# Altium PCB PCB.PcbDoc
Units mm, origin at the board's own origin, x right, y up, seen from the top; angles counter-clockwise.
Board outline 17.15 x 17.99 mm, 2 copper layers (Top Layer, Bottom Layer), stack 1.55 mm thick; 6 components, 5 nets, 24 pads, 0 vias.
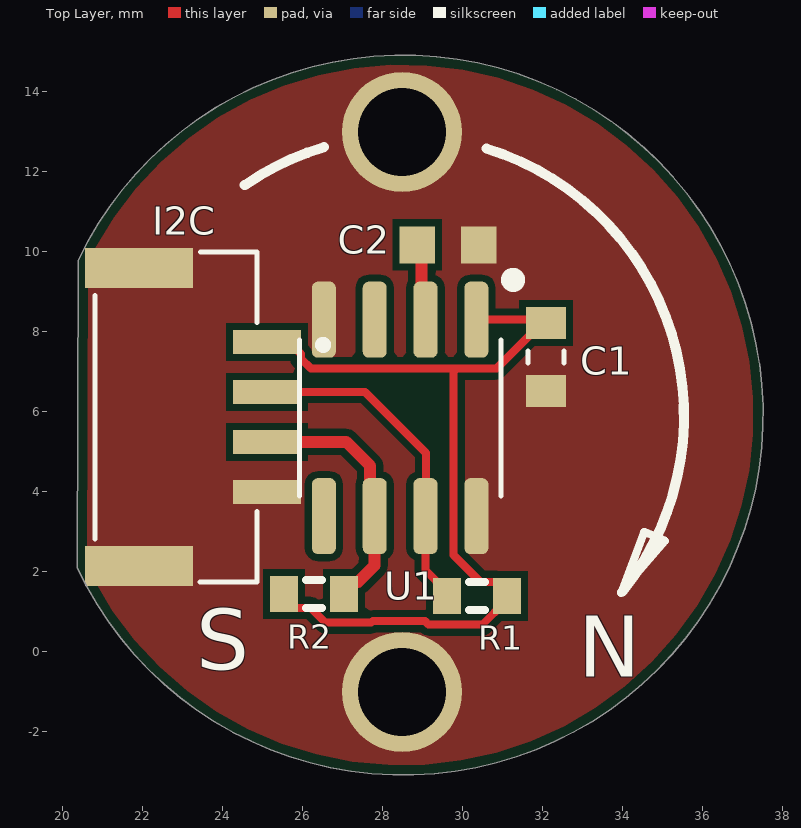
[diagram p0: Top Layer view]
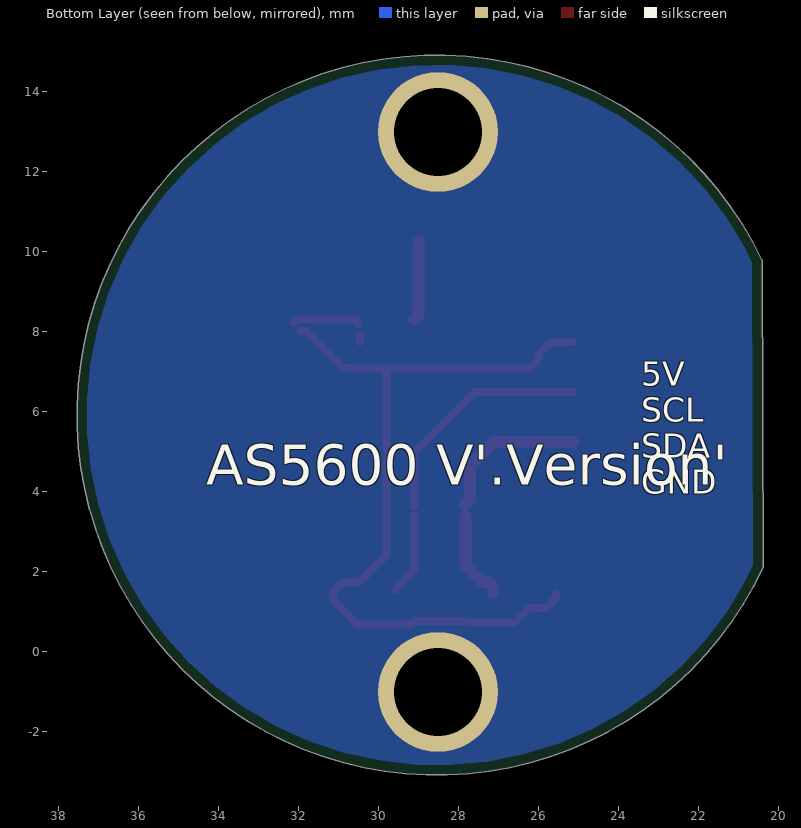
[diagram p1: Bottom Layer view, seen from below]
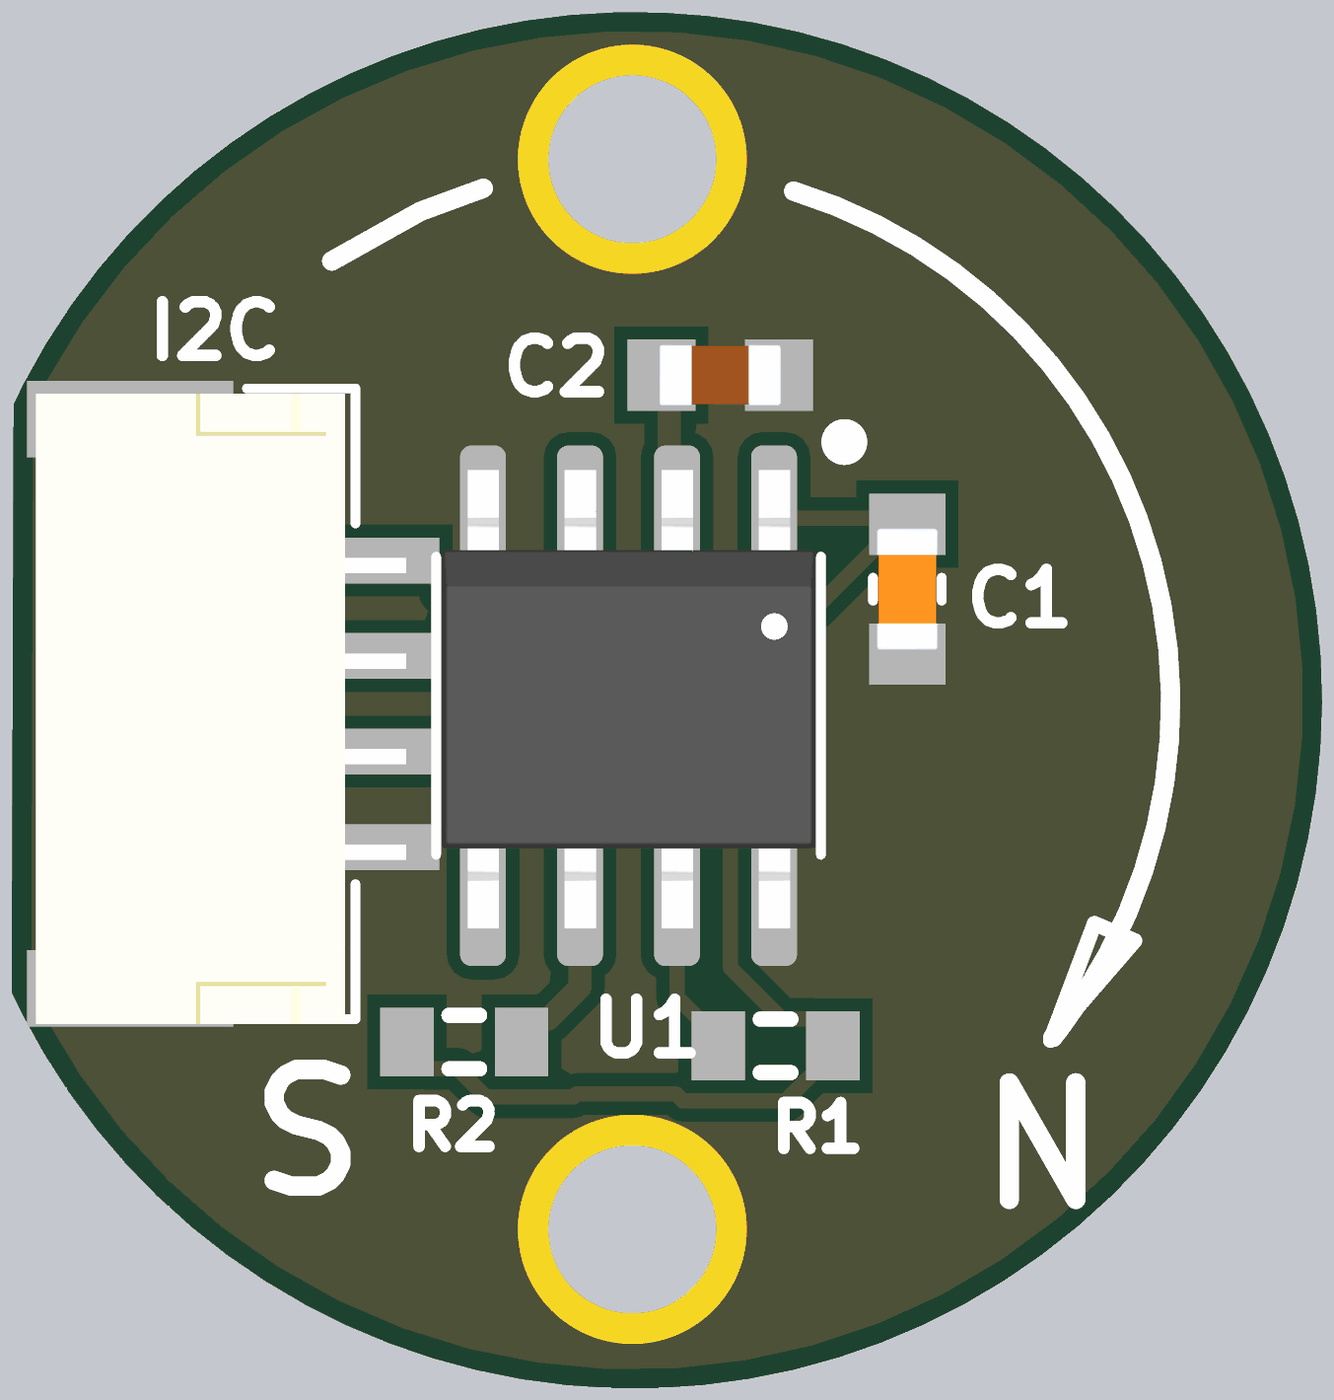
[diagram p2: 3D render of the assembled board from above, using the file's embedded part models]

## Layer stack, top to bottom
Top Solder: solder mask 0.01, Solder Resist, Dk 3.5
Top Layer: signal copper 0.05
Dielectric 1: dielectric 1.45, FR-4, Dk 4.8
Bottom Layer: signal copper 0.05
Bottom Solder: solder mask 0.01, Solder Resist, Dk 3.5

## Board outline
20.375,2.1 20.4,9.775 20.399,9.79 cw(c28.526,5.922)

## Design rules (kind name [scope] priority, off if disabled: settings)
BoardOutlineClearance [All] p1: gap=0.25 ignorepadtopadclearanceinfootprint=FALSE
Clearance [All] p1: gap=0.17 ignorepadtopadclearanceinfootprint=FALSE
ComponentClearance [All] p1: gap=0.1 collisioncheckmode=3 verticalgap=2540 showdistances=FALSE
FanoutControl Fanout_SOIC [IsSOIC] p3: bgadir=Out bgaviamode=Closest fanoutstyle=Auto fanoutdirection=Alternating viagrid=0.025 // Fanout_SOIC (Default Rule)
FanoutControl Fanout_Small [(CompPinCount < 5)] p4: bgadir=Out bgaviamode=Closest fanoutstyle=Auto fanoutdirection=OutThenIn viagrid=0.025 // Fanout_Small (Default Rule)
FanoutControl Fanout_Default [All] p5: bgadir=In bgaviamode=Closest fanoutstyle=Auto fanoutdirection=Alternating viagrid=0.025 // Fanout_Default (Default Rule)
HoleSize [All] p1: absolutevalues=TRUE maxlimit=4.5 minlimit=0.3 maxpercent=80.000 minpercent=20.000
HoleToHoleClearance [All] p1: gap=0.4 allowstackedmicrovias=TRUE
MinimumSolderMaskSliver [All] p1: minsoldermaskwidth=0.15
PlaneClearance [All] p1: clearance=0.2
PlaneConnect [All] p1: planeconnectstyle=Relief reliefexpansion=0.5 reliefentries=4 reliefconductorwidth=0.2 reliefairgap=0.25
PolygonConnect PolygonConnect_1 [InNet('GND') vs IsStitchingVia and InNet('GND')] p1: connectstyle=Direct reliefconductorwidth=0.254 reliefentries=4 polygonreliefangle="90 Angle" airgapwidth=0.254
PolygonConnect [All] p2: connectstyle=Direct reliefconductorwidth=0.3 reliefentries=4 polygonreliefangle="90 Angle" airgapwidth=0.16
RoutingCorners [All] p1: cornerstyle=45-Degree minsetback=2.5 maxsetback=2.5
RoutingPriority [All] p1 off: routingpriority=0
RoutingVias [All] p1: holewidth=0.3 width=0.7 viastyle="Through Hole" minholewidth=0.3 minwidth=0.7 maxholewidth=0.8 maxwidth=1.2
SilkToSilkClearance [All] p1: silktosilkclearance=0
SilkToSolderMaskClearance [IsPad] p1: minsilkscreentomaskgap=0 clearancetoexposedcopper=TRUE
SolderMaskExpansion [All] p1: expansion=0 istentingtop=FALSE
Width [All] p1: maxlimit=5 minlimit=0.17 preferedwidth=0.17 minimp=50.000000 maximp=50.000000 favimp=50.000000
17 further rules are at their usual default settings.

## Components (designator, comment, footprint, x,y, rotation, side; value= is the part's Value field where it differs from the comment)
C1 "GX035C104MAT2-500" *CAPC1608X90 32.1,7.375 r270 top value=0.1u
C2 "GRM188R71C105KA12D" CAPC1608X90N 29.65,10.175 r180 top value=1u
I2C "SM04B-GHS-TB(LF)(SN)-" JST_SM04B-GHS-TB(LF)(SN)- 22.85,5.875 r270 top
R1 "RC0603FR-074K7L" J1-0603 30.375,1.4 r0 top value=4.7k
R2 "RC0603FR-074K7L" J1-0603 26.3,1.45 r180 top value=4.7k
U1 "AS5600" SOIC127P600X175-8N 28.45,5.85 r270 top

## Footprints (in the part's own frame and the unit in brackets; to place one, negate y for a bottom-side part, rotate by r counter-clockwise, add the part's x,y. Pads: shape width x height; smd on the part's side, far side on the other; paste and mask are expansions set on the pad)
*CAPC1608X90 [mm]
  rect 0.8x1 smd: 1(-0.85,0) 2(0.85,0)
  silkscreen extent -0.15,-0.45 0.15,0.45, body extent -0.8,-0.4 0.8,0.41, height 0.88
CAPC1608X90N [mm]
  rect 0.89x0.93 smd: 1(-0.77,0) 2(0.77,0)
  body extent -0.8,-0.4 0.8,0.4, height 0.9
J1-0603 [mm] "Chip Resistor, Body 1.6x0.8mm, IPC High Density"
  rect 0.7x0.9 smd: 1(-0.75,0) 2(0.75,0)
  silkscreen extent -0.2,-0.35 0.2,0.35, body extent -0.85,-0.48 0.85,0.48, height 0.9
JST_SM04B-GHS-TB(LF)(SN)- [mm]
  rect 0.6x1.7 smd: 1(-1.875,2.275) 2(-0.625,2.275) 3(0.625,2.275) 4(1.875,2.275)
  rect 1x2.7 smd: SH1(-3.725,-0.925) SH2(3.725,-0.925)
  silkscreen extent -4.12,-2.02 4.13,3.77, body extent -4.06,-2.16 4.19,2.69, height 4.35
SOIC127P600X175-8N [mm]
  rrect50% 1.9x0.6 smd: 1(-2.455,1.905) 2(-2.455,0.635) 3(-2.455,-0.635) 4(-2.455,-1.905) 5(2.455,-1.905) 6(2.455,-0.635) 7(2.455,0.635) 8(2.455,1.905)
  silkscreen extent -3.55,-2.52 1.95,2.93, body extent -3.08,-2.45 2.92,2.45, height 1.73

## Part data
C1: "Cap Thin Film 0.1uf 50v 0603", Package="0603 AVX", ChipDip_Link=https://www.chipdip.ru/product0/9000410929, MF=AVX, MP=GX035C104MAT2-500, SnapEDA_Link=https://www.snapeda.com/parts/GX035C104MAT2-500/AVX/view-part/?ref=snap, Type=SMD
C2: "SMD Capacitor X7R(EIA) with Capacitance: 1.0uF Tol. 10%. Rated Voltage: 16Vdc", Package=0603, ChipDip_Link=https://www.chipdip.ru/product/grm188r71c105ka12d, HelpURL=https://static.chipdip.ru/lib/428/DOC005428493.pdf, MF="Murata Electronics", MP=GRM188R71C105KA12D, SnapEDA_Link=https://www.snapeda.com/parts/GRM188R71C105KA12D/Murata%20Electronics%20North%20America/view-part/228340/?ref=snap, Type=SMD
I2C: "Connector Header Surface Mount, Right Angle 4 position 0.049 _1.25mm_", Package=None, ChipDip_Link=https://www.chipdip.ru/product/sm04b-ghs-tb-lf-sn-gh-1.25mm-header-side-ent, HelpURL=http://www.farnell.com/datasheets/2082975.pdf, Instructions=DNP, MF="JST Sales", MP=SM04B-GHS-TB(LF)(SN), SnapEDA_Link=https://www.snapeda.com/parts/SM04B-GHS-TB%28LF%29%28SN%29-/JST%20Sales%20America%20Inc./view-part/2759740/?ref=snap, System=Connector
R1 R2: "4.7 kOhms ±1% 0.1W, 1/10W Chip Resistor 0603 (1608 Metric) Thick Film", Package=R0603, ChipDip_Link=https://www.chipdip.ru/product0/9000079736, HelpURL=https://www.yageo.com/upload/media/product/productsearch/datasheet/rchip/PYu-RC_Group_51_RoHS_L_10.pdf, MF="Yageo or NXP", MP=RC0603FR-074K7L, SnapEDA_Link=https://www.snapeda.com/parts/RC0603FR-074K7L/Yageo/view-part/?ref=dk&t=RC0603FR-074K7L&con_ref=None, Type=SMD
U1: "Hall Effect Sensor Angle External Magnet, Not Included Gull Wing", Package="SOIC-8 ams", Availability="In Stock", Check_prices=https://www.snapeda.com/parts/AS5600-ASOT/ams/view-part/?ref=eda, MF=ams, MP=AS5600, Price=None, Purchase-URL=https://pricing.snapeda.com/search/part/AS5600-ASOT/?ref=eda, SnapEDA_Link=https://www.snapeda.com/parts/AS5600-ASOT/ams/view-part/?ref=snap

## Free pads (board coordinates)
  round 3 hole 2.2: ""(28.5,-1) ""(28.5,13)

## Nets (pads, with @x,y where several pads share a name; then routed paths per layer and width w, separated by ;. In a path a pad name is that pad's centre, name@x,y a point inside that pad or via, vN(x,y) a via of type N, cw(c..) or ccw(c..) an arc to the next point about the centre after c; other vN are vias at no path point)
3.3: C2.2 U1.2 | length 2
  Top Layer w0.3: C2.2@28.975,10.25 28.982,10.243 28.982,8.408 U1.2
5V: C1.1 I2C.1 R1.2 R2.2 U1.1 | length 22
  Top Layer w0.2: I2C.1 25.675,7.75 25.975,7.45 25.975,7.331 26.221,7.085 30.825,7.085 ; R2.2 25.55,1.35 25.8,1.1 26.218,1.1 26.588,0.73 27.727,0.73 27.767,0.77 29.073,0.77 29.163,0.68 30.505,0.68 R1.2@31.075,1.25 ; 29.825,7.05 29.785,7.01 29.785,2.421 30.086,2.12 ; 30.087,2.12 30.457,1.75 30.875,1.75 31.125,1.5 R1.2 ; U1.1@30.45,7.75 U1.1@30.45,7.925 ; U1.1@30.5,8.2 30.5,8.254 30.551,8.305 32.02,8.305 C1.1 ; 30.86,7.085 31.8,8.025 C1.1@31.95,8.025
GND: C1.2 C2.1 I2C.4 I2C.SH1 I2C.SH2 pad. U1.4 U1.8
SCL/PWM4A: I2C.2 R1.1 U1.7 | length 8
  Top Layer w0.2: I2C.2 27.575,6.5 29.1,4.975 U1.7@29.1,3.625 ; U1.7 29.085,2.04 R1.1@29.575,1.55
SDA/PWM4B: I2C.3 R2.1 U1.6 | length 6.1
  Top Layer w0.3: I2C.3 27.1,5.25 27.7,4.65 27.7,3.825 U1.6@27.825,3.7 ; R2.1@27.125,1.475 27.125,1.625 27.25,1.75 27.4,1.75 27.815,2.165 U1.6
pads on no net: U1.3 U1.5

## Polygon pours and split planes (outlines as drawn)
GND on Bottom Layer "GND_L02_P001" (solid, remove dead copper, pour order 1): 39.4,30.25 0.425,30.25 -6.2,23.625 -6.2,-1.725 -0.15,-7.775 40.25,-7.775 45.05,-2.975 45.05,27.125
GND on Top Layer "GND_L01_P000" (solid, remove dead copper, pour order 0): 40.825,29.5 -0.2,29.5 -4.8,24.9 -4.8,-0.925 -0.65,-5.075 40.85,-5.075 45.65,-0.275 43.95,1.425 43.95,26.55

## Silkscreen, mask and mechanical layers (free items; w line width, h text height)
Top Overlay:
  lines w0.2: 33.975,1.475 34.55,3 35.075,2.775 33.975,1.5
  lines w0.254: 24.565,11.668 cw(c28.548,5.912) 26.547,12.62 ; 30.612,12.583 cw(c28.548,5.894) 34.006,1.512
  text "S" at 23.354,-0.446 h1.52
  text "N" at 32.904,-0.621 h1.52
Bottom Overlay:
  text "AS5600 V'.Version'" at 34.298,4.175 h1
  text "5V / SCL / SDA / GND" at 23.425,3.95 h0.6
Mechanical 2:
  lines w0.05: 20.375,2.1 20.4,9.775 ; 20.377,2.101 ccw(c28.526,5.922) 20.399,9.79